# Altium PCB Motor Driver.PcbDoc
Units mm, origin at the board's own origin, x right, y up, seen from the top; angles counter-clockwise.
Board outline 70 x 60 mm, 2 copper layers (Top Layer, Bottom Layer), stack 1.071 mm thick; 31 components, 19 nets, 71 pads, 0 vias.
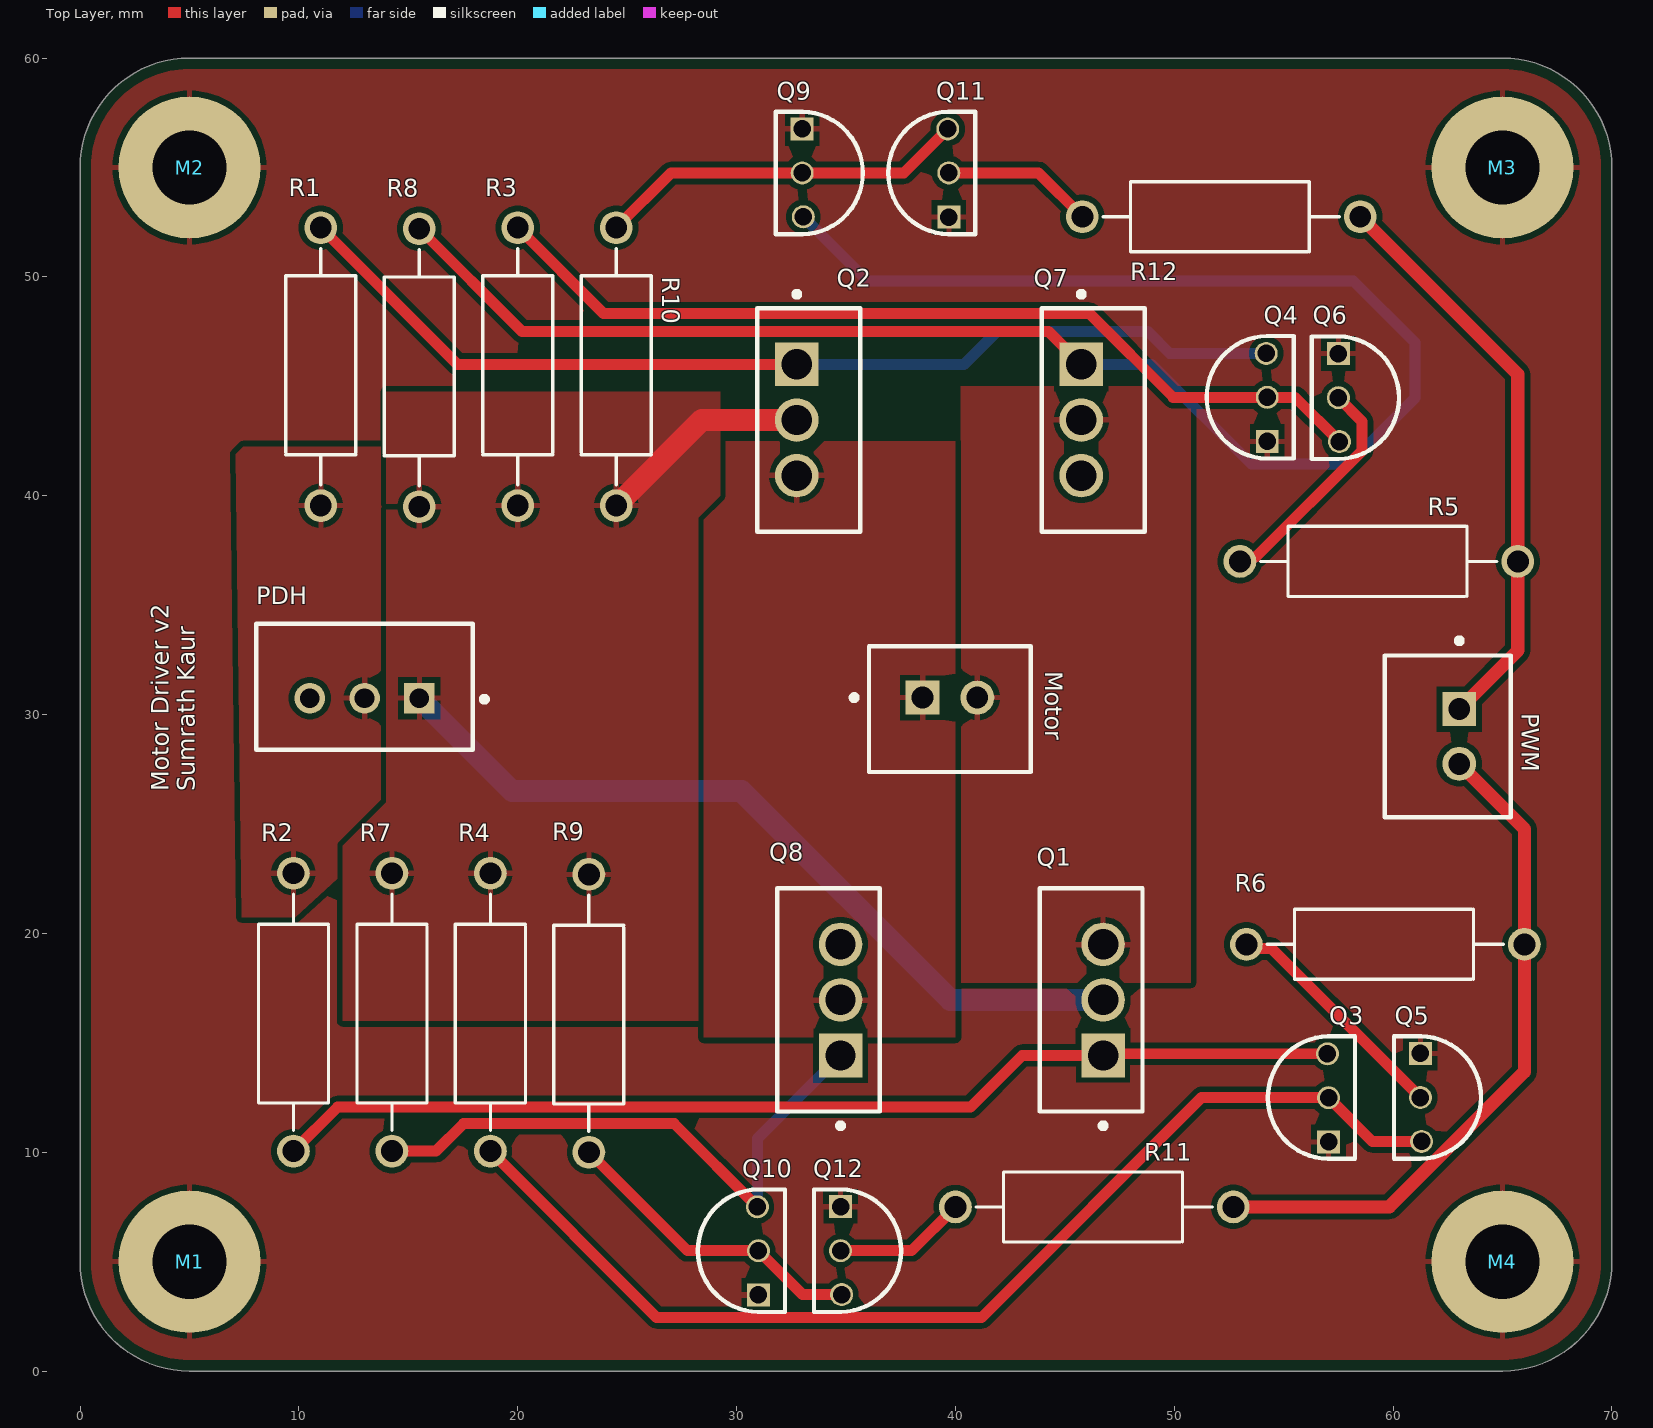
[diagram p0: Top Layer view]
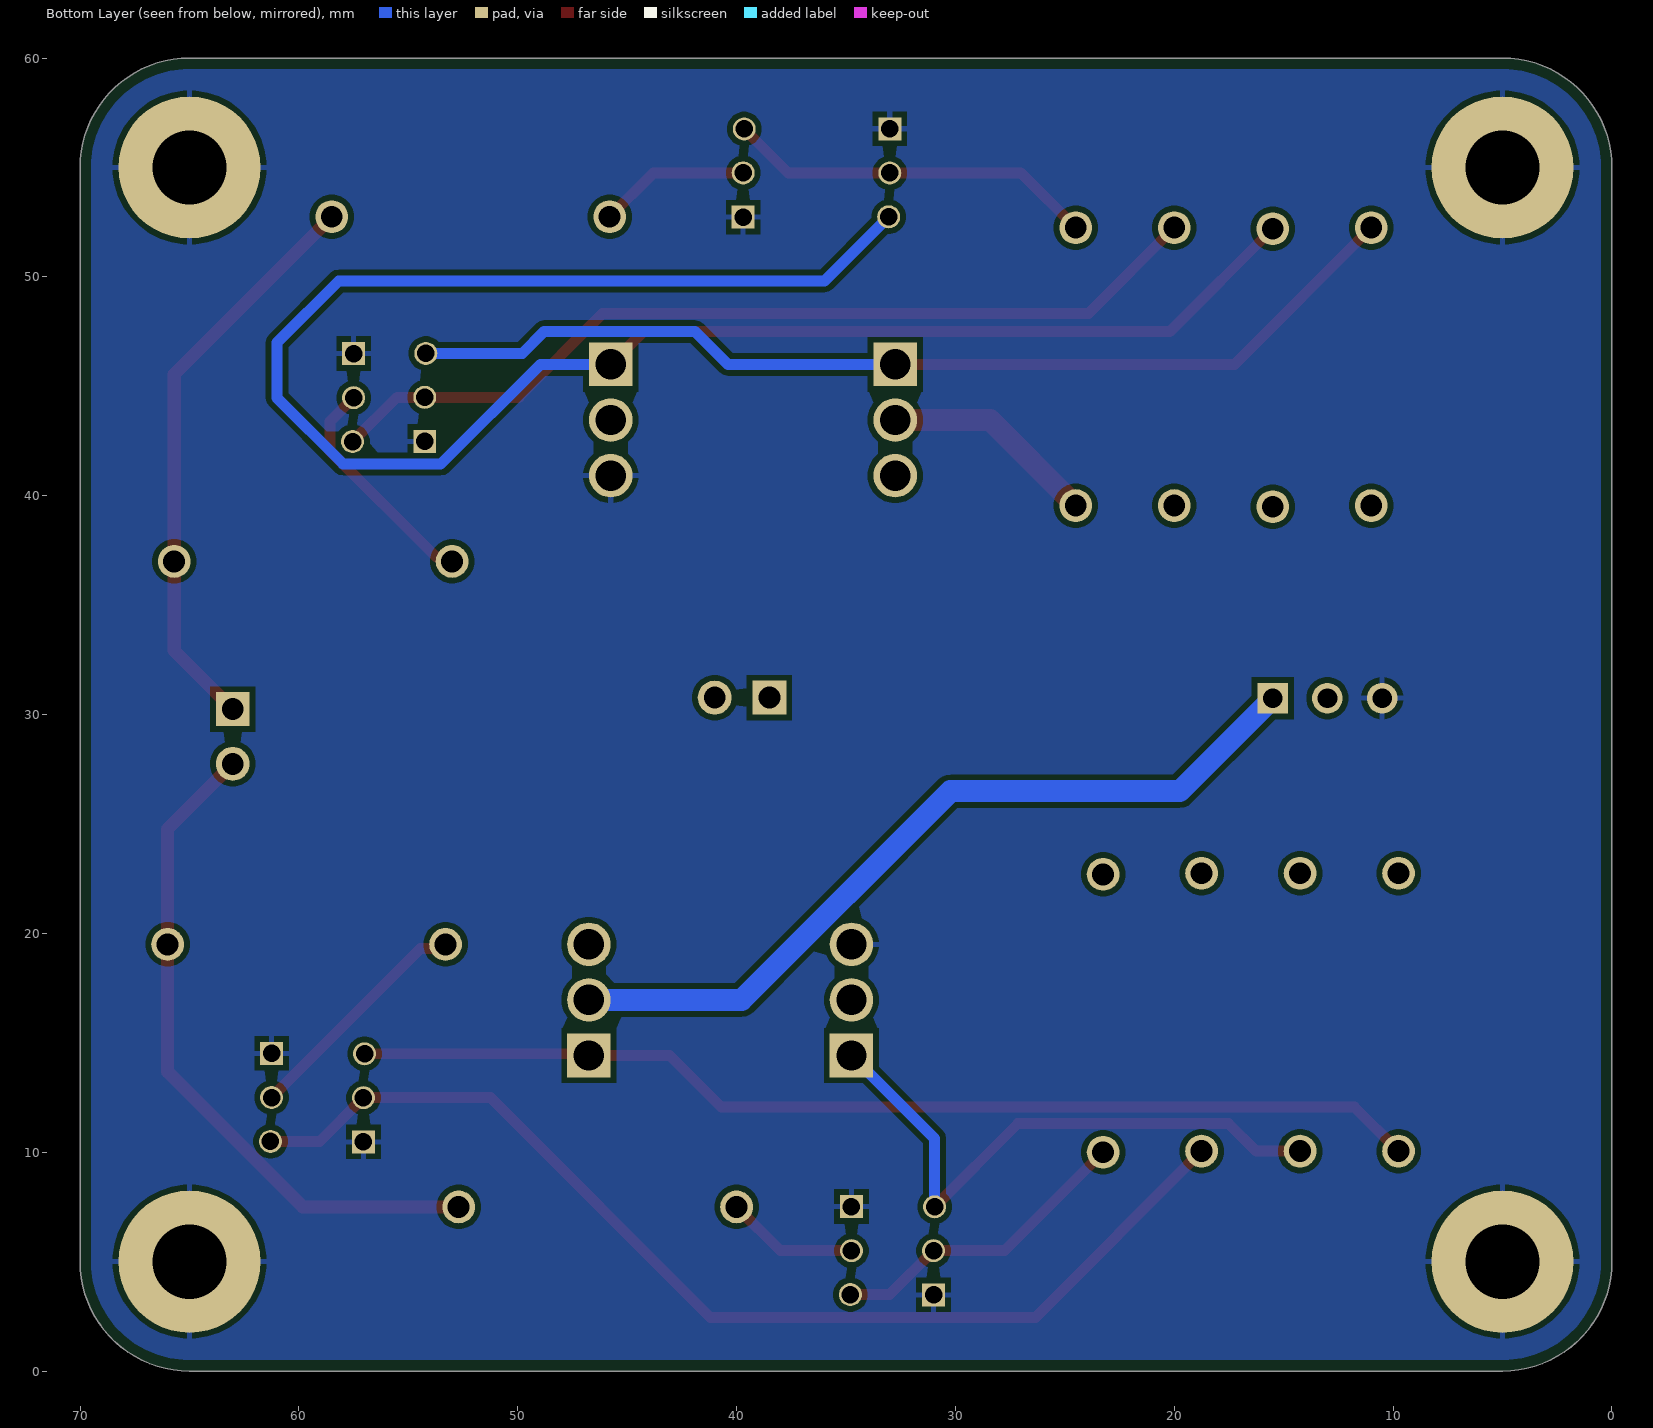
[diagram p1: Bottom Layer view, seen from below]

## Layer stack, top to bottom
Top Solder: solder mask 0.0102, Solder Resist, Dk 3.5
Top Layer: signal copper 0.0356
Dielectric 1: dielectric 1, FR-4, Dk 4.8
Bottom Layer: signal copper 0.0356
Bottom Solder: solder mask 0.0102, Solder Resist, Dk 3.5

## Board outline
0,5 0,55 cw(c5,55) 5,60 65,60 cw(c65,55) 70,55 70,5 cw(c65,5) 65,0 5,0 cw(c5,5)

## Design rules (kind name [scope] priority, off if disabled: settings)
BoardOutlineClearance [All] p1: gap=0.5 ignorepadtopadclearanceinfootprint=FALSE
Clearance "Clearance Polygon" [InPolygon vs Not InPolygon] p1: gap=0.254 ignorepadtopadclearanceinfootprint=FALSE
Clearance [All] p2: gap=0.254 ignorepadtopadclearanceinfootprint=FALSE
PolygonConnect [All] p1: connectstyle=Relief reliefconductorwidth=0.254 reliefentries=4 polygonreliefangle="90 Angle" airgapwidth=0.254
RoutingVias [All] p1: holewidth=0.711 width=1.27 viastyle="Through Hole" minholewidth=0.711 minwidth=1.27 maxholewidth=0.711 maxwidth=1.27
SolderMaskExpansion [All] p1: expansion=0 istentingtop=FALSE
SupplyNets "Schematic Supply Nets_4" [InNet('21V')] p1: voltage=0.000
SupplyNets "Schematic Supply Nets_3" [InNet('16V')] p2: voltage=0.000
SupplyNets "Schematic Supply Nets" [InNet('GND')] p3: voltage=0.000
Width "Power Width" [All] p1: maxlimit=1 minlimit=0.5 preferedwidth=0.6
Width [All] p2: maxlimit=0.254 minlimit=0.254 preferedwidth=0.254
30 further rules are at their usual default settings.

## Classes and differential pairs
component class Main: M4 Q1 Q2 Q3 Q4 Q5 Q6 Q7 Q8 Q9 Q10 Q11 Q12 R1 R2 R3 R4 R5 R6 R7 R8 R9 R10 R11 R12

## Components (designator, comment, footprint, x,y, rotation, side; value= is the part's Value field where it differs from the comment)
M1 "M3 Mounting Hole Plated" "M3 Screw Hole - Plated" 5,5 r0 top
M2 "M3 Mounting Hole Plated" "M3 Screw Hole - Plated" 5,55 r0 top
M3 "M3 Mounting Hole Plated" "M3 Screw Hole - Plated" 65,55 r0 top
M4 "M3 Mounting Hole Plated" "M3 Screw Hole - Plated" 65,5 r0 top
Motor "Motor" FP-B2B-XH-A_LF_SN-MFG 39.75,30.25 r0 top (schematic designator J3)
PDH "Power" FP-B3B-XH-A_LF_SN-MFG 13,31.275 r180 top (schematic designator J1)
PWM "PWM" FP-B2B-XH-A_LF_SN-MFG 62.5,29 r270 top (schematic designator J2)
Q1 "IRFZ44N" IFX-PG-TO220-3-904-1 46.75,16.96 r90 top
Q2 "IRFZ44N" IFX-PG-TO220-3-904-1 32.75,43.46 r270 top
Q3 "2N3904BU" 2n3904 57.05,11.225 r90 top
Q4 "2N3904BU" 2n3904 54.25,43.23 r90 top
Q5 "2N3904BU" 2n3904 61.25,13.77 r270 top
Q6 "2N3904BU" 2n3904 57.5,45.75 r270 top
Q7 "IRFZ44N" IFX-PG-TO220-3-904-1 45.75,43.46 r270 top
Q8 "IRFZ44N" IFX-PG-TO220-3-904-1 34.75,16.96 r90 top
Q9 "2N3904BU" 2n3904 33,56.02 r270 top
Q10 "2N3904BU" 2n3904 31,4.23 r90 top
Q11 "2N3904BU" 2n3904 39.7,53.485 r90 top
Q12 "2N3904BU" 2n3904 34.75,6.77 r270 top
R1 "10k" "Axial 0.5" 11,39.55 r90 top
R2 "10k" "Axial 0.5" 9.75,22.75 r270 top
R3 "10k" "Axial 0.5" 20,39.55 r90 top
R4 "10k" "Axial 0.5" 18.75,22.75 r270 top
R5 "10k" "Axial 0.5" 65.7,37 r180 top
R6 "10k" "Axial 0.5" 66,19.5 r180 top
R7 "10k" "Axial 0.5" 14.25,22.75 r270 top
R8 "10k" "Axial 0.5" 15.5,39.5 r90 top
R9 "10k" "Axial 0.5" 23.25,22.7 r270 top
R10 "10k" "Axial 0.5" 24.5,39.55 r90 top
R11 "10k" "Axial 0.5" 52.7,7.5 r180 top
R12 "10k" "Axial 0.5" 58.5,52.75 r180 top

## Footprints (in the part's own frame and the unit in brackets; to place one, negate y for a bottom-side part, rotate by r counter-clockwise, add the part's x,y. Pads: shape width x height; smd on the part's side, far side on the other; paste and mask are expansions set on the pad)
2n3904 [mm] "TO, 3-Leads, Body Dia 4.79mm, Pitch 1.27mm"
  rect 1.05x1.05 hole 0.8 mask+0.05: 1(-0.75,0)
  round 1.05 hole 0.8 mask+0.05: 2(1.27,0) 3(3.275,0.05)
  silkscreen extent -1.53,-1.21 4.07,2.77
"Axial 0.5" [mm]
  round 1.5 hole 1: 1(0,0) 2(12.7,0)
  silkscreen extent 0.95,-1.6 11.75,1.6
FP-B2B-XH-A_LF_SN-MFG [mm]
  rect 1.55x1.55 hole 1 paste-2539.97 mask+0: 1(-1.25,0.525)
  round 1.55 hole 1 paste-2539.97 mask+0: 2(1.25,0.525)
  silkscreen extent -4.5,-2.88 3.7,2.88, body extent -3.8,-2.98 3.8,2.98, height 0.25
FP-B3B-XH-A_LF_SN-MFG [mm]
  rect 1.4x1.4 hole 0.9 paste-2539.97 mask+0: 1(-2.5,0.525)
  round 1.4 hole 0.9 paste-2539.97 mask+0: 2(0,0.525) 3(2.5,0.525)
  silkscreen extent -5.6,-2.88 4.95,2.88, body extent -5.05,-2.98 5.05,2.98, height 0.25
IFX-PG-TO220-3-904-1 [mm] "TO,flange mount,2.54 mm pitch, 3 pin, 10.16 mm L X 4.57 mm W X 20.56 mm H body"
  rect 1.99x1.99 hole 1.39 paste-2539.97 mask+0: 1(-2.54,0)
  round 1.99 hole 1.39 paste-2539.97 mask+0: 2(0,0) 3(2.54,0)
  silkscreen extent -5.87,-1.8 5.1,2.9, body extent -5.16,-1.72 5.16,2.86, height 19.84
"M3 Screw Hole - Plated" [mm]
  round 6.5 hole 3.4: 1(0,0)

## Part data
M1 M2 M3 M4: library part CMP-019-000000-3, Design Item ID="M3 Mounting Hole Plated", Source="UBC Formula Electric.SchLib"
Motor PWM: library part CMP-2000-05888-3, "CONN HEADER VERT 2POS 2.5MM", Color=Natural, Contact Resistance=20mR, Current Rating=3A, Housing Color=White, Insulation Resistance=1GR, Max Operating Temperature=85°C, Max Voltage Rating (AC)=250V, Min Operating Temperature=-25°C, Connector Type="Male Pin", Contact Material=Brass, Contact Plating=Tin, Contact Type="Male Pin", Depth=5.75mm, Fastening Type=Detent, Housing Material=Polyamide, Lead Free="Lead Free", Lead Pitch=2.5mm, Length=7.4mm, Max Current Rating=3A, Max Voltage Rating (DC)=250V, Mount="Through Hole", Number of Contacts=2, Number of Positions=2, Number of Rows=1, Orientation=Straight, Packaging=Bulk, Pitch=2.5mm, REACH SVHC="No SVHC", Series=XH, Termination=Solder, Voltage Rating=250V, Voltage Rating (AC)=250V, Wire/Cable Gauge=22AWG
PDH: library part CMP-17439-000014-3, "CONN HEADER VERT 3POS 2.5MM", Color=Natural, Contact Resistance=20mR, Current Rating=3A, Flammability Rating="UL94 V-0", Housing Color=White, Insulation Resistance=1GR, Max Operating Temperature=85°C, Max Voltage Rating (AC)=250V, Min Operating Temperature=-25°C, Connector Type=Header, Contact Finish - Mating=TIN, Contact Material=Brass, Contact Plating=Tin, Contact Shape=Square, Contact Type="Male Pin", Depth=5.75mm, Fastening Type=Detent, Gender=Male, Housing Material=Polyamide, Insulation Color=Natural, Insulation Material=Nylon, Lead Free="Lead Free", Lead Pitch=2.5mm, Length=9.9mm, Max Current Rating=3A, Max Voltage Rating (DC)=250V, Mount="Through Hole", Number of Contacts=3, Number of Positions=3, Number of Rows=1, Orientation=Straight, Packaging=Bulk, Pitch=2.5mm, REACH SVHC="No SVHC", Series=XH, Termination=Solder, Voltage Rating=250V, Voltage Rating (AC)=250V, Wire/Cable Gauge=22AWG
Q1 Q2 Q7 Q8: "OptiMOS 3 Power-Transistor, VDS 100V", Manufacturer="Infineon Technologies", Manufacturer Order Number=IRFZ44N, PackageReference=PG-TO220-3-904
Q3 Q4 Q5 Q6 Q9 Q10 Q11 Q12: library part 2n3904, "NPN General-Purpose Amplifier, 40 V VCEO, 0.2 A, -55 to 150 degC, 2-Pin TO-92, RoHS, Bulk", Manufacturer=FairchildSemiconductor, Maximum Collector Base Voltage=60V, Maximum Collector Emitter Saturation Voltage=0.2@1mA@10mA, Maximum Collector Emitter Voltage=40V, Maximum DC Collector Current=0.2A, Maximum Operating Frequency=300(Min)MHz, Maximum Power Dissipation=625mW, Minimum DC Current Gain=40@0.1mA@1V, Operating Temperature=-55to150degC, Package=3TO-92, Package Description="3-Pin Transistor Outline Package, Body Dia 4.79 mm, Pitch 1.27 mm", Package Reference=TO-92, Category=GPBJT, Datasheet URL=https://datasheet.ciiva.com/4722/2n3904-82270-4722369.pdf, Datasheet Version="Rev. 1.1.0, 10/2014", Manufacturer URL=https://www.fairchildsemi.com/, Mounting=ThroughHole, Packaging=Bulk, Pin Count=3, Rad Hard=No, Type=NPN
R1 R2 R3 R4 R5 R6 R7 R8 R9 R10 R11 R12: library part RES_GENERIC

## Nets (pads, with @x,y where several pads share a name; then routed paths per layer and width w, separated by ;. In a path a pad name is that pad's centre, name@x,y a point inside that pad or via, vN(x,y) a via of type N, cw(c..) or ccw(c..) an arc to the next point about the centre after c; other vN are vias at no path point)
16V: PDH.1 Q1.2 Q2.2 R3.1 R4.1 R7.1 R8.1 R9.1 R10.1 | length 46.8
  Top Layer w1: R10.1 28.41,43.46 Q2.2
  Bottom Layer w1: PDH.1 19.75,26.5 30.223,26.5 39.763,16.96 Q1.2
21V: PDH.2 R1.1 R2.1
GND: M1.1 M2.1 M3.1 M4.1 PDH.3 Q3.1 Q4.1 Q5.1 Q6.1 Q7.3 Q8.3 Q9.1 Q10.1 Q11.1 Q12.1
MOTOR_0: Motor.1 Q2.3 Q8.2
MOTOR_1: Motor.2 Q1.3 Q7.2
NetQ1_1: Q1.1 Q3.3 R2.2 | length 49.1
  Top Layer w0.5: R2.2 11.758,12.058 40.692,12.058 43.054,14.42 Q1.1 46.83,14.5 Q3.3
NetQ2_1: Q2.1 Q4.3 R1.2 | length 46.8
  Top Layer w0.5: R1.2 17.25,46 Q2.1
  Bottom Layer w0.5: Q2.1 40.399,46 41.898,47.499 48.802,47.499 49.796,46.505 Q4.3
NetQ3_2: Q3.2 Q5.3 R4.2 | length 50.7
  Top Layer w0.5: R4.2 26.349,2.451 41.201,2.451 51.245,12.495 Q3.2 59.05,10.495 Q5.3
NetQ4_2: Q4.2 Q6.3 R3.2 | length 41.6
  Top Layer w0.5: R3.2 23.918,48.332 46.121,48.332 49.953,44.5 Q4.2 55.525,44.5 Q6.3
NetQ5_2: Q5.2 R6.2 | length 10.8
  Top Layer w0.5: R6.2 53.491,19.309 54.441,19.309 Q5.2
NetQ6_2: Q6.2 R5.2 | length 10.5
  Top Layer w0.5: R5.2 53.191,37.191 53.722,37.191 58.579,42.049 58.579,43.401 Q6.2
NetQ7_1: Q7.1 Q9.3 R8.2 | length 84.1
  Top Layer w0.5: R8.2 20.201,47.499 44.251,47.499 Q7.1
  Bottom Layer w0.5: Q9.3 35.975,49.82 58.18,49.82 61,47 61,44.47 57.976,41.446 53.521,41.446 48.967,46 Q7.1
NetQ8_1: Q8.1 Q10.3 R7.2 | length 27.3
  Top Layer w0.5: R7.2 16.268,10.05 17.522,11.304 27.151,11.304 Q10.3
  Bottom Layer w0.5: Q10.3 30.95,10.62 Q8.1
NetQ9_2: Q9.2 Q11.3 R10.2 | length 17
  Top Layer w0.5: R10.2 27,54.75 Q9.2 37.64,54.75 Q11.3
NetQ10_2: Q10.2 Q12.3 R9.2 | length 14.2
  Top Layer w0.5: R9.2 27.75,5.5 Q10.2 33.005,3.495 Q12.3
NetQ11_2: Q11.2 R12.2 | length 6.9
  Top Layer w0.5: Q11.2 43.795,54.755 R12.2
NetQ12_2: Q12.2 R11.2 | length 6.1
  Top Layer w0.5: Q12.2 38,5.5 R11.2
PWM_0: PWM.1 R5.1 R12.1 | length 26.6
  Top Layer w0.6: R12.1 65.7,45.55 R5.1 65.7,32.925 PWM.1
PWM_1: PWM.2 R6.1 R11.1 | length 31.2
  Top Layer w0.6: R11.1 59.831,7.5 66,13.669 R6.1 66,24.775 PWM.2

## Polygon pours and split planes (outlines as drawn)
GND on Top Layer "GND_L01_P006" (solid, remove dead copper, pour order 6): 0,5 0,55 cw(c5,55) 5,60 65,60 cw(c65,55) 70,55 70,5 cw(c65,5) 65,0 5,0 cw(c5,5)
MOTOR_0 on Top Layer "MOTOR_0_L01_P004" (solid, remove dead copper, pour order 4): 28.5,42.5 40,42.5 40,15.25 28.5,15.25
MOTOR_1 on Top Layer "MOTOR_1_L01_P005" (solid, remove dead copper, pour order 5): 40.25,17.75 50.75,17.75 50.75,45 40.25,45
16V on Top Layer "16V_L01_P003" (solid, remove dead copper, pour order 3): 14,44.75 29.25,44.75 29.25,42.25 29.25,40 27.25,38 14,38
16V on Top Layer "16V_L01_P001" (solid, remove dead copper, pour order 1): 14,42.25 14,26 12,24 12,16 28.25,16 28.25,42.25 14.5,42.25
21V on Top Layer "21V_L01_P002" (solid, remove dead copper, pour order 2): 7.105,42.25 14,42.25 14,24.562 9.841,20.75 7.388,20.75
GND on Bottom Layer "GND_L02_P000" (solid, remove dead copper, pour order 0): 0,5 0,55 cw(c5,55) 5,60 65,60 cw(c65,55) 70,55 70,5 cw(c65,5) 65,0 5,0 cw(c5,5)

## Silkscreen, mask and mechanical layers (free items; w line width, h text height)
Top Overlay:
  text "Motor Driver v2 / Sumrath Kaur" at 5.25,26.5 h0.8 r90
Board Shape:
  the board outline again, w0.254